# Altium PCB L50T-TEST.PcbDoc (part 1 of 2)
Units mm, origin at the board's own origin, x right, y up, seen from the top; angles counter-clockwise.
Board outline 174.25 x 233.6 mm, 2 copper layers (Top Layer, Bottom Layer); 176 components, 146 nets, 565 pads, 293 vias.
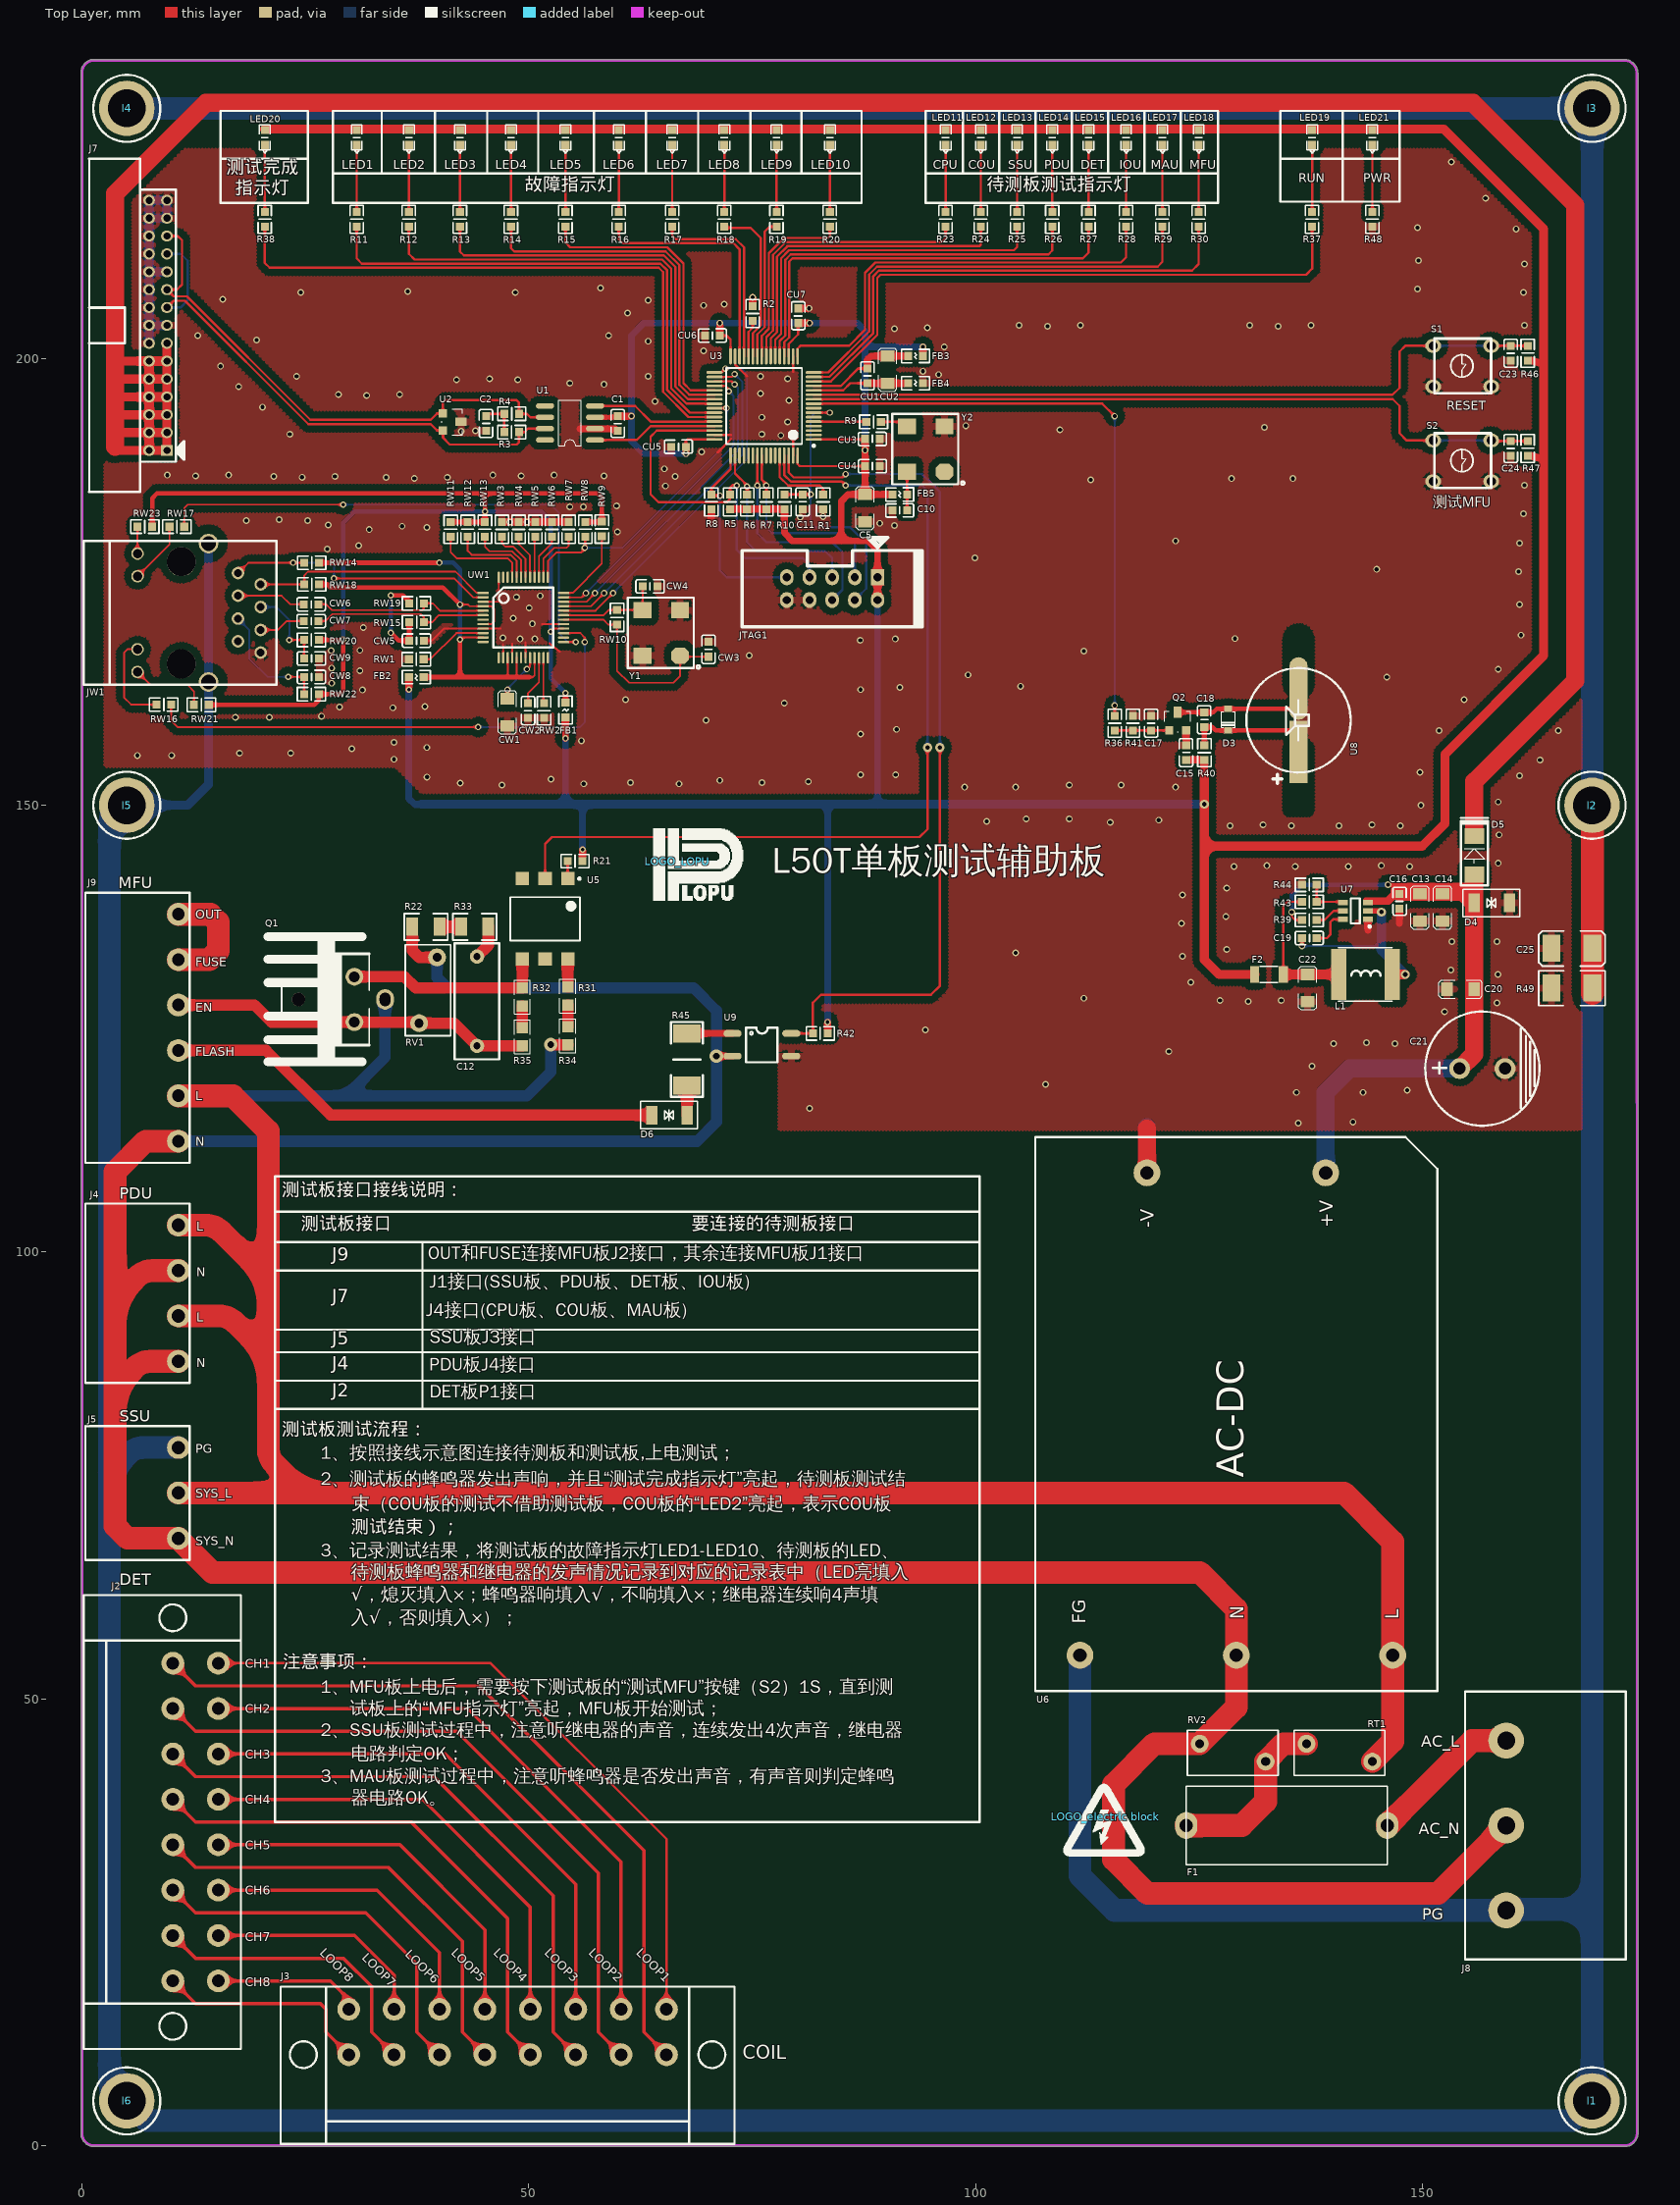
[diagram p0: Top Layer view]
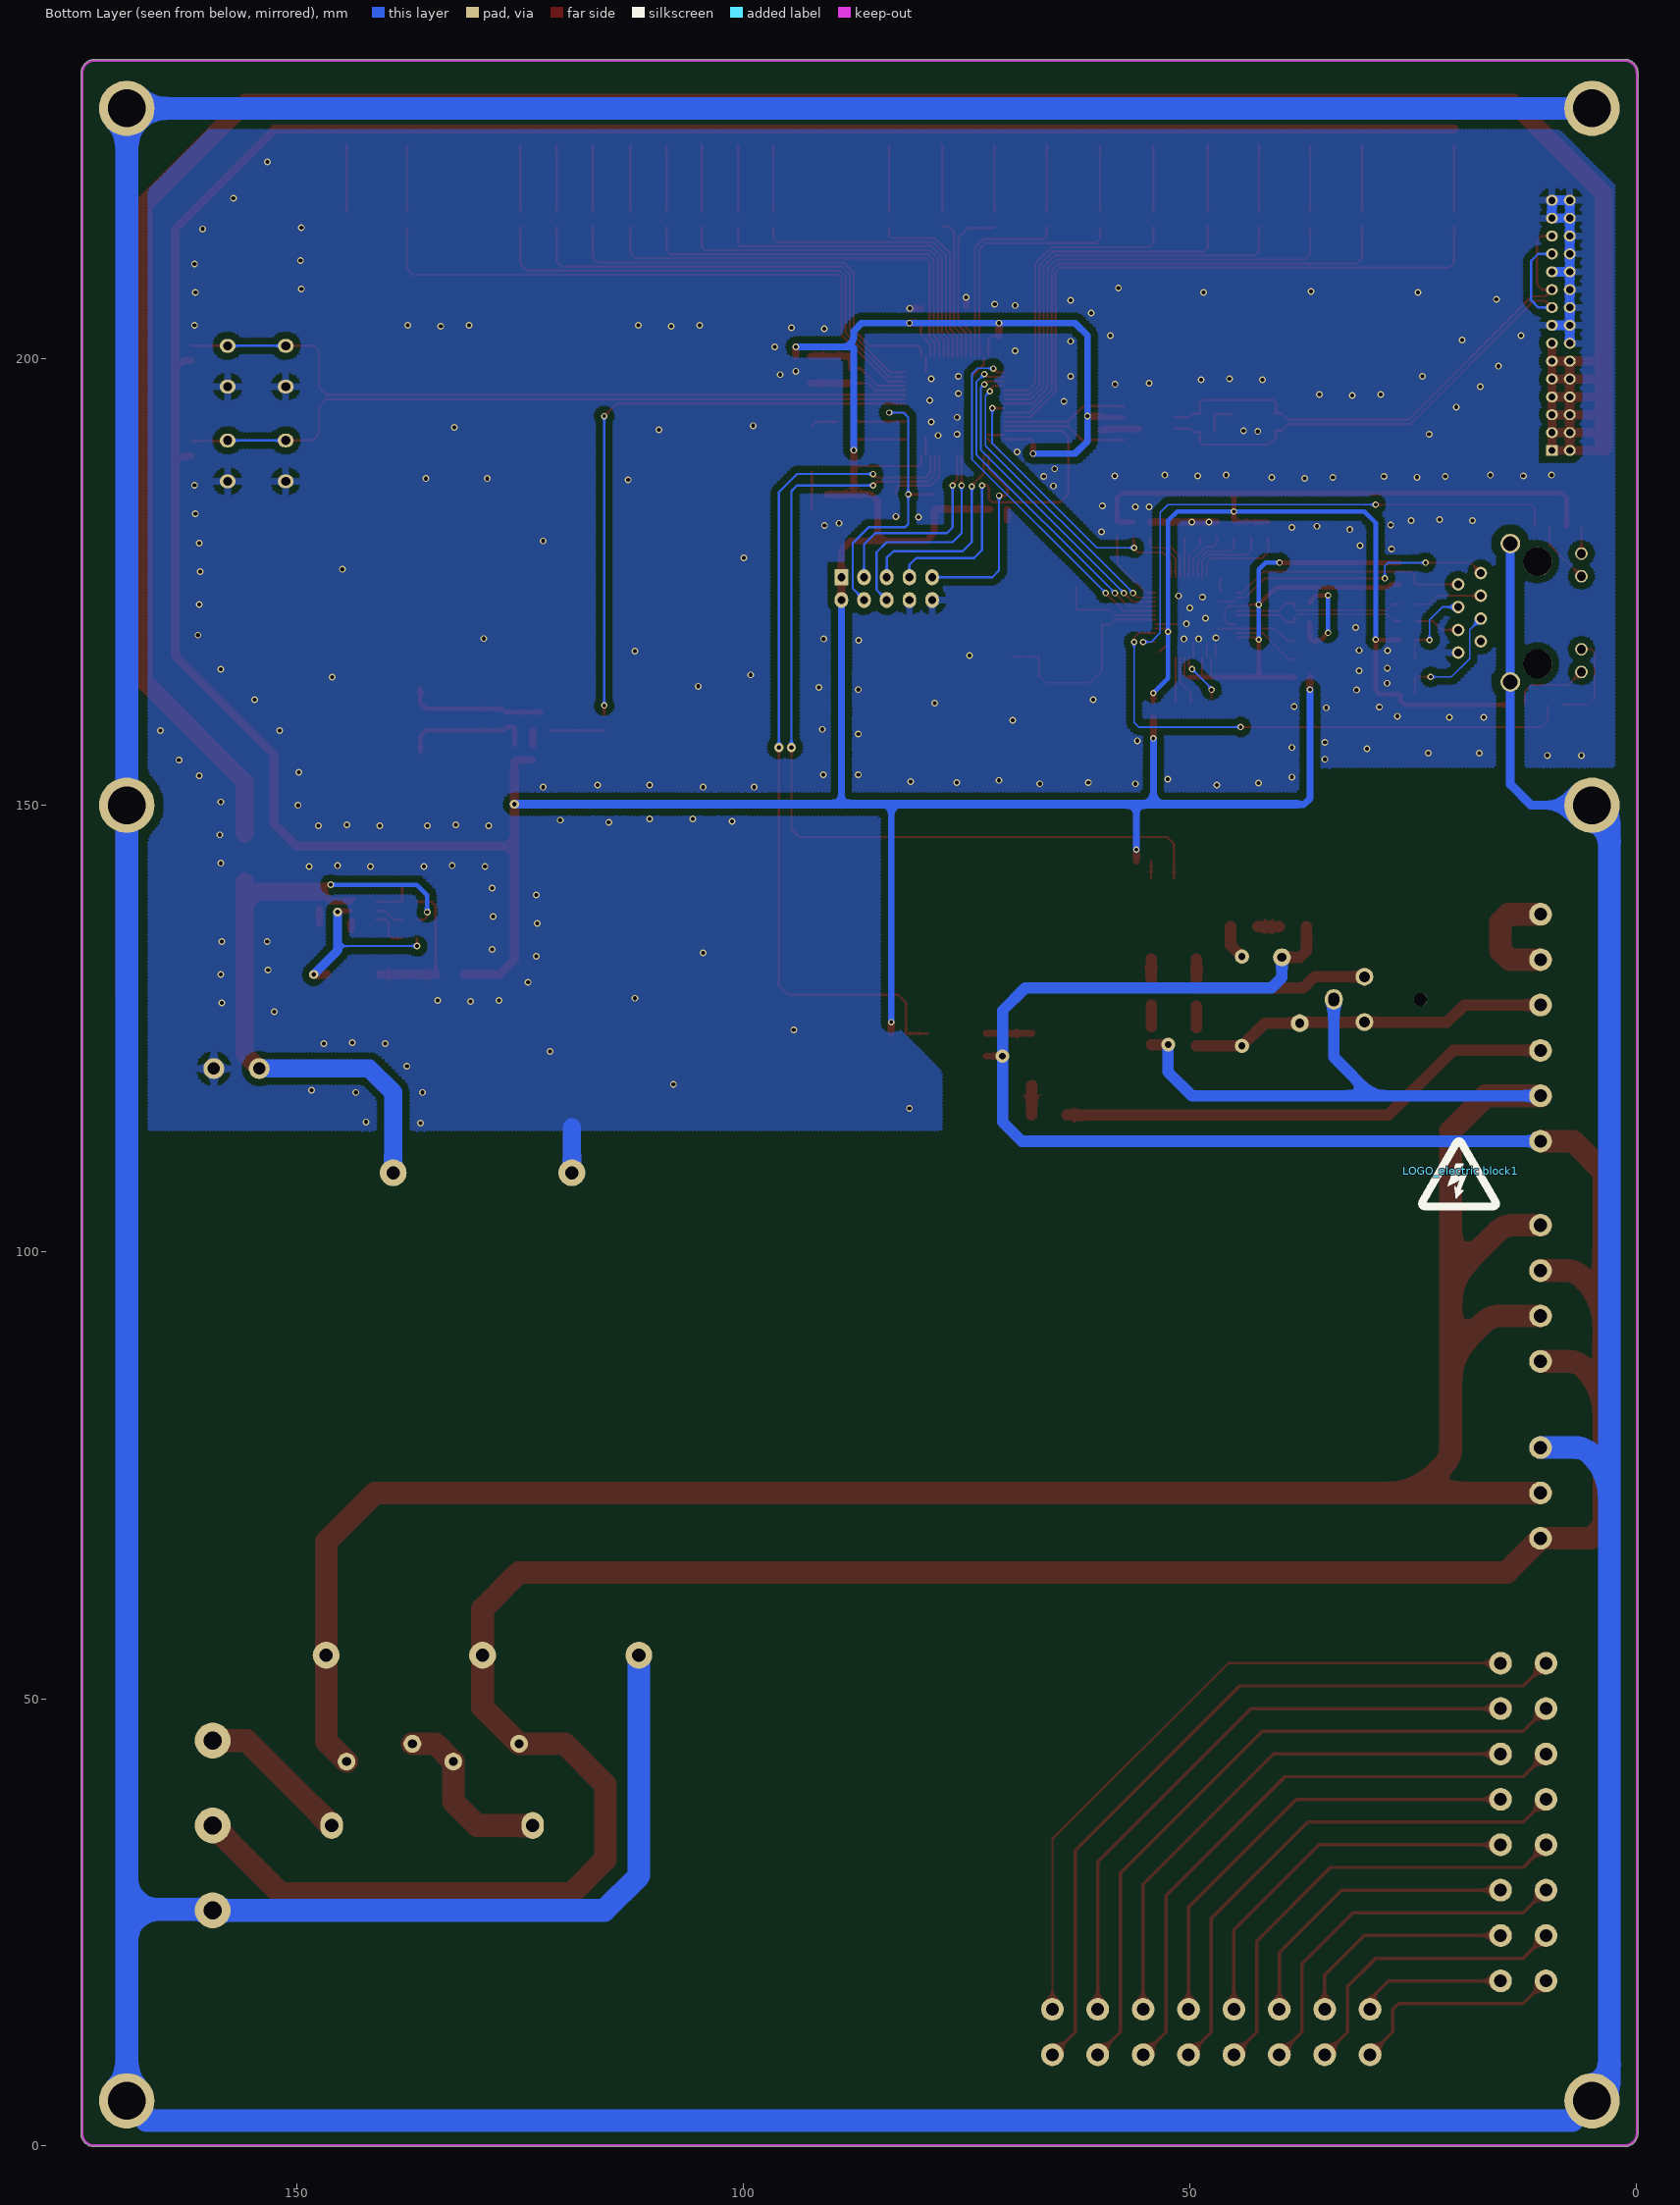
[diagram p1: Bottom Layer view, seen from below]

## Layer stack, top to bottom
Top Solder: solder mask 0.0102, Solder Resist, Dk 3.5
Top Layer: signal copper 0.0356
Dielectric1: dielectric 0.32, FR-4, Dk 4.8
Bottom Layer: signal copper 0.0356
Bottom Solder: solder mask 0.0102, Solder Resist, Dk 3.5

## Board outline
-0.127,1.35 cw(c0,1.35) -0.127,1.351 -0.127,1.35 ccw(c1.35,1.35) 1.35,-0.127 172.65,-0.127 ccw(c172.65,0) 172.682,-0.123 ccw(c172.65,1.354) 174.123,1.236 ccw(c174,1.27) 174.127,1.27 ccw(c174,1.27) 174.127,1.27 174.127,1.351 174.127,1.355 cw(c174,1.354) 174.127,1.354 cw(c172.65,1.354) 174.127,1.351 174.127,1.355 174.117,231.901 ccw(c172.567,231.928) 174.118,231.928 ccw(c172.567,231.928) 172.595,233.477 ccw(c172.593,233.35) 172.593,233.477 1.397,233.477 ccw(c1.397,233.35) 1.375,233.476 ccw(c1.354,233.35) 1.354,233.477 ccw(c1.354,232) -0.115,232.16 ccw(c0,232.105) -0.127,232.105

## Design rules (kind name [scope] priority, off if disabled: settings)
Clearance Clearance_220 [InNetClass('220') vs InNetClass('220')] p1: gap=2.54 ignorepadtopadclearanceinfootprint=FALSE except(0: Arc-Hole Track-Hole SMDPad-Hole THPad-Hole Via-Hole Fill-Hole Poly-Hole Region-Hole Text-Hole)
Clearance Clearance_pg&dgnd [InNet('PG') vs InNet('DGND')] p2: gap=1.016 ignorepadtopadclearanceinfootprint=FALSE except(0: Arc-Hole Track-Hole SMDPad-Hole THPad-Hole Via-Hole Fill-Hole Poly-Hole Region-Hole Text-Hole)
Clearance Clearance_POLY [InPolygon] p3: gap=0.762 ignorepadtopadclearanceinfootprint=FALSE except(0: Arc-Hole Track-Hole SMDPad-Hole THPad-Hole Via-Hole Fill-Hole Poly-Hole Region-Hole Text-Hole)
Clearance Clearance_MCU [InComponent('U3')] p4: gap=0.178 ignorepadtopadclearanceinfootprint=FALSE except(0: Arc-Hole Track-Hole SMDPad-Hole THPad-Hole Via-Hole Fill-Hole Poly-Hole Region-Hole Text-Hole)
Clearance [All] p5: gap=0.203 ignorepadtopadclearanceinfootprint=FALSE except(0: Arc-Hole Track-Hole SMDPad-Hole THPad-Hole Via-Hole Fill-Hole Poly-Hole Region-Hole Text-Hole)
ComponentClearance [All] p1 off: gap=0.254 collisioncheckmode=3 verticalgap=0.254 showdistances=FALSE
DiffPairsRouting [All] p1: maxlimit=0.254 minlimit=0.254 mostfreqgap=0.254 toplayer_minwidth=0.381 toplayer_maxwidth=0.381 toplayer_prefwidth=0.381 bottomlayer_minwidth=0.381 bottomlayer_maxwidth=0.381 bottomlayer_prefwidth=0.381 maxuncoupledlength=12.7
Height [All] p1: minheight=0 maxheight=50.8 prefheight=12.7
HoleSize [All] p1: absolutevalues=TRUE maxlimit=6 minlimit=0.025 maxpercent=80.000 minpercent=20.000
PolygonConnect PolygonConnect_VIA [IsVia] p1: connectstyle=Direct reliefconductorwidth=0.254 reliefentries=4 polygonreliefangle="90 Angle" airgapwidth=0.254
PolygonConnect [All] p2: connectstyle=Relief reliefconductorwidth=0.762 reliefentries=4 polygonreliefangle="90 Angle" airgapwidth=0.508
RoutingVias [All] p1: holewidth=0.457 width=0.762 viastyle="Through Hole" minholewidth=0.254 minwidth=0.254 maxholewidth=1.27 maxwidth=2.54
SilkToSilkClearance [All] p1 off: silktosilkclearance=0.254
SolderMaskExpansion [All] p1: expansion=0.102
Width [All] p1: maxlimit=2.54 minlimit=0.127 preferedwidth=0.254
25 further rules are at their usual default settings.

## Classes and differential pairs
differential pair DifferentialPair_STM32-CAN: +CAN_RX -CAN_TX
differential pair DifferentialPair_CAN: +CAN1_H -CAN1_L
differential pair DifferentialPair_TD: +TD+ -TD-
differential pair DifferentialPair_RD: +RD+ -RD-

## Components (designator, comment, footprint, x,y, rotation, side; value= is the part's Value field where it differs from the comment)
C1 "0603-50V-0.1UF-X7R-K" 0603C 59.944,193.548 r270 top
C2 "DNP" 0603C 45.212,191.897 r90 top
C5 "1206-16V-10UF-X5R-K" 1206C 87.63,181.737 r90 top
C10 "0603-50V-0.1UF-X7R-K" 0603c 92.329,183.007 r180 top
C11 "0603-50V-0.1UF-X7R-K" 0603C 80.645,183.134 r90 top
C12 "B32671L1222J289" CAP-10-5 44.196,133.063 r270 top
C13 "1206-16V-10UF-X5R-K" 1206C 149.733,137.033 r90 top locked
C14 "1206-16V-10UF-X5R-K" 1206C 152.273,137.033 r90 top locked
C15 "0603-50V-0.1UF-X7R-K" 0603C 123.569,155.067 r90 top locked
C16 "0603-50V-0.1UF-X7R-K" 0603C 147.447,140.081 r270 top locked
C17 "0603-50V-0.1UF-X7R-K" 0603C 119.632,160.02 r270 top locked
C18 "0603-50V-0.1UF-X7R-K" 0603C 125.601,158.75 r90 top locked
C19 "0603-50V-0.1UF-X7R-K" 0603C 136.525,135.128 r0 top locked
C20 "1206-16V-10UF-X5R-K" 1206C 155.806,129.413 r180 top
C21 "35YXF220MEFC10X125" RB.2/.4 154.178,120.523 r180 top
C22 "1206-10V-47UF-Y5V-M" 1206C 137.16,128.016 r90 top locked
C23 "0603-50V-0.1UF-X7R-K" 0603C 159.893,201.422 r270 top
C24 "0603-50V-0.1UF-X7R-K" 0603C 159.893,190.754 r270 top
C25 "1812-1NF/2KV" 1812C 169.037,133.985 r180 top locked
CU1 "0603-50V-0.01UF-X7R-K" 0603C 87.884,198.882 r270 top locked
CU2 "1206-16V-10UF-X5R-K" 1206C 90.17,200.279 r270 top locked
CU3 "0603-50V-0.1UF-X7R-K" 0603C 89.281,191.008 r180 top
CU4 "0603-50V-0.1UF-X7R-K" 0603C 89.281,187.96 r180 top
CU5 "0603-50V-0.1UF-X7R-K" 0603C 65.913,190.119 r0 top
CU6 "0603-50V-0.1UF-X7R-K" 0603C 69.723,202.565 r0 top
CU7 "0603-50V-0.1UF-X7R-K" 0603C 80.137,205.613 r270 top
CW1 "1206-16V-4.7UF-X5R-K" 1206C 47.6,161.925 r270 top locked
CW2 "0603-50V-0.01uF-X7R-K" 0603C 49.911,161.417 r270 top locked
CW3 "0603-50V-18pF-C0G-K" 0603C 70.104,168.275 r270 top
CW4 "0603-50V-18pF-C0G-K" 0603C 64.389,174.498 r180 top
CW5 "10n/0603" 0603C 36.601,168.427 r0 top locked
CW6 "0603-50V-6.8nF-X7R-K" 0603C 24.816,172.491 r0 top
CW7 "0603-50V-6.8nF-X7R-K" 0603C 24.816,170.612 r0 top
CW8 "0603-10NF" 0603C 24.841,164.363 r0 top
CW9 "0603-22NF" 0603C 24.841,166.421 r0 top
D3 "1N4148" SOD-323 128.27,158.369 r90 top
D4 "SMBJ15CA" SMB-TVS 159.766,139.065 r180 top locked
D5 "SS14" SMA 155.829,144.399 r90 top locked
D6 "SMBJ130CA" SMB-TVS 67.714,115.316 r180 top locked
F1 "T2AH250VP" FUSE-BF013 146.071,35.814 r180 top
F2 "贴片1206/nSMD035（台湾陆海）" 1206F 132.842,131.064 r180 top
FB1 "0603 31@100MHz" 0603L#1 54.102,160.655 r90 top
FB2 "0603 31@100MHz" 0603L#2 36.576,164.338 r0 top
FB3 "0603 31@100MHz" 0603L#2 94.107,200.279 r180 top locked
FB4 "0603 31@100MHz" 0603L#2 94.107,197.231 r180 top locked
FB5 "0603 31@100MHz" 0603L#2 92.329,184.785 r180 top
I1 "PCB-M3" PADS_M3 169,5 r0 top locked
I2 "PCB-M3" PADS_M3 169,150 r0 top locked
I3 "PCB-M3" PADS_M3 169,228 r0 top locked
I4 "PCB-M3" PADS_M3 5,228 r0 top locked
I5 "PCB-M3" PADS_M3 5,150 r0 top locked
I6 "PCB-M3" PADS_M3 5,5 r0 top locked
J2 "Header 8X2H" KF2EDGKRHM-5.08-8 15.24,18.415 r90 top
J3 "Header 8X2H" KF2EDGKRHM-5.08-8 65.405,15.24 r180 top
J4 "Header 4H" CON-4-5.08 10.77,87.757 r90 top locked
J5 "Header 3" CON-3-5.08 10.77,67.945 r90 top locked
J7 "Header15x2" IDC-30-2.0-C 0.793,186.327 r90 top locked
J8 "Header 3" CON-3-9.5 154.785,50.814 r270 top
J9 "Header 6" CON-6-5.08 10.77,112.395 r90 top locked
JTAG1 "Header 5X2" IDC-10-B 89.027,175.514 r180 top
JW1 "HY911105A" HY911105A 3.087,171.541 r90 top
L1 "贴片6045功率电感 3.3uH 5A" L-6045 143.637,131.064 r270 top locked
LED1 "Red" LED-0603 30.734,225.552 r270 top locked
LED2 "Red" LED-0603 36.576,225.552 r270 top locked
LED3 "Red" LED-0603 42.291,225.552 r270 top locked
LED4 "Red" LED-0603 48.006,225.552 r270 top locked
LED5 "Red" LED-0603 54.102,225.552 r270 top locked
LED6 "Red" LED-0603 60.071,225.552 r270 top locked
LED7 "Red" LED-0603 66.04,225.552 r270 top locked
LED8 "Red" LED-0603 71.882,225.552 r270 top locked
LED9 "Red" LED-0603 77.724,225.552 r270 top locked
LED10 "Red" LED-0603 83.693,225.552 r270 top locked
LED11 "Green" LED-0603 96.647,225.552 r270 top locked
LED12 "Green" LED-0603 100.584,225.552 r270 top locked
LED13 "Green" LED-0603 104.648,225.552 r270 top locked
LED14 "Green" LED-0603 108.585,225.552 r270 top locked
LED15 "Green" LED-0603 112.649,225.552 r270 top locked
LED16 "Green" LED-0603 116.84,225.552 r270 top locked
LED17 "Green" LED-0603 120.904,225.552 r270 top locked
LED18 "Green" LED-0603 124.968,225.552 r270 top locked
LED19 "Blue" LED-0603 137.668,225.552 r270 top locked
LED20 "Yellow" LED-0603 20.447,225.552 r270 top locked
LED21 "Red" LED-0603 144.399,225.552 r270 top locked
"LOGO_electric block" "electric block" "electric block logo" 114.579,36.805 r0 top
"LOGO_electric block1" "electric block" "electric block logo" 19.685,109.093 r180 bottom (schematic designator "LOGO_electric block")
LOGO_LOPU "LOPU_LOGO" LOPU_LOGO 66.599,143.725 r0 top
Q1 "BTA16-600" TO-220AB-C 30.48,125.73 r90 top locked
Q2 "8050" SOT-23 123.569,158.369 r180 top locked
R1 "0603-10K-1%" 0603R 82.931,184.785 r270 top
R2 "0603-10K-1%" 0603R 75.057,205.867 r270 top
R3 "DNP" 0603R 48.895,191.77 r180 top
R4 "DNP" 0603R 47.244,193.802 r0 top
R5 "0603-10K-1%" 0603R 72.517,184.785 r270 top
R6 "0603-10K-1%" 0603R 74.422,184.785 r270 top
R7 "0603-10K-1%" 0603R 76.581,184.785 r270 top
R8 "0603-10K-1%" 0603R 70.427,183.134 r90 top
R9 "0603-22-1%" 0603R 87.757,192.913 r0 top
R10 "0603-10K-1%" 0603R 78.613,184.785 r270 top
R11 "0603-680-1%" 0603R 30.734,214.757 r90 top locked
R12 "0603-680-1%" 0603R 36.576,214.757 r90 top locked
R13 "0603-680-1%" 0603R 42.291,214.757 r90 top locked
R14 "0603-680-1%" 0603R 48.006,214.757 r90 top locked
R15 "0603-680-1%" 0603R 54.102,214.757 r90 top locked
R16 "0603-680-1%" 0603R 60.071,214.757 r90 top locked
R17 "0603-680-1%" 0603R 66.04,214.757 r90 top locked
R18 "0603-680-1%" 0603R 71.882,214.757 r90 top locked
R19 "0603-680-1%" 0603R 77.724,214.757 r90 top locked
R20 "0603-680-1%" 0603R 83.693,214.757 r90 top locked
R21 "0603-330-1%" 0603R 56.007,143.764 r180 top locked
R22 "1210-25.5-1%" 1210R 36.957,136.398 r0 top
R23 "0603-680-1%" 0603R 96.647,214.757 r90 top locked
R24 "0603-680-1%" 0603R 100.584,214.757 r90 top locked
R25 "0603-680-1%" 0603R 104.648,214.757 r90 top locked
R26 "0603-680-1%" 0603R 108.585,214.757 r90 top locked
R27 "0603-680-1%" 0603R 112.649,214.757 r90 top locked
R28 "0603-680-1%" 0603R 116.84,214.757 r90 top locked
R29 "0603-680-1%" 0603R 120.904,214.757 r90 top locked
R30 "0603-680-1%" 0603R 124.968,214.757 r90 top locked
R31 "0805-1.2K-1%" 0805R 54.356,129.667 r270 top locked
R32 "0805-1.2K-1%" 0805R 49.276,129.54 r270 top locked
R33 "1210-25.5-1%" 1210R 42.418,136.398 r0 top
R34 "0805-1.2K-1%" 0805R 54.356,125.222 r270 top locked
R35 "0805-1.2K-1%" 0805R 49.276,125.095 r270 top locked
R36 "0603-4.7K-1%" 0603R 115.568,160.02 r270 top locked
R37 "0603-680-1%" 0603R 137.668,214.757 r90 top locked
R38 "0603-680-1%" 0603R 20.447,214.757 r90 top locked
R39 "0603-10K-1%" 0603R 138.176,137.16 r180 top
R40 "0603-0-1%" 0603R 125.601,156.718 r270 top locked
R41 "0603-3.3K-1%" 0603R 117.6,160.02 r270 top locked
R42 "0603-3.3K-1%" 0603R 83.439,124.46 r180 top
R43 "0603-33.2K-1%" 0603R 136.525,139.192 r0 top locked
R44 "0603-10K-1%" 0603R 138.176,141.097 r180 top locked
R45 "2512-56K-5% RV" 2512R 67.691,121.539 r90 top locked
R46 "0603-10K-1%" 0603R 161.798,199.771 r90 top
R47 "0603-10K-1%" 0603R 161.798,189.103 r90 top
R48 "0603-680-1%" 0603R 144.399,214.757 r90 top locked
R49 "1808-1M-1%" 1812R 163.093,131.445 r270 top locked
RT1 "5D-11" 10D471K 137.033,44.958 r0 top
RV1 "10D471K" 10D471K 39.719,132.969 r270 top
RV2 "10D471K" 10D471K 125.095,44.958 r0 top
RW1 "12.4K/1%/0603" 0603R 38.227,166.345 r180 top locked
RW2 "10K/1%/0603" 0603R 51.689,161.417 r270 top locked
RW3 "10K/1%/0603" 0603R 46.99,181.712 r270 top locked
RW4 "10K/1%/0603" 0603R 48.853,181.712 r270 top locked
RW5 "10K/1%/0603" 0603R 50.715,181.712 r270 top locked
RW6 "10K/1%/0603" 0603R 52.578,181.712 r270 top locked
RW7 "10K/1%/0603" 0603R 54.458,181.712 r270 top locked
RW8 "10K/1%/0603" 0603R 56.312,180.061 r90 top locked
RW9 "10K/1%/0603" 0603R 58.166,180.086 r90 top
RW10 "1M/1%/0603" 0603R 59.868,171.856 r270 top locked
RW11 "10K/1%/0603" 0603R 41.25,180.061 r90 top locked
RW12 "10K/1%/0603" 0603R 43.155,180.061 r90 top locked
RW13 "10K/1%/0603" 0603R 45.085,180.061 r90 top locked
RW14 "49R9/1%/0603" 0603R 24.867,177.14 r0 top
RW15 "82/1%/0603" 0603R 36.601,170.485 r0 top locked
RW16 "330 0603 1%" 0603R 8.306,161.265 r0 top
RW17 "330 0603 1%" 0603R 9.779,181.178 r0 top
RW18 "49R9/1%/0603" 0603R 24.867,174.727 r0 top
RW19 "82/1%/0603" 0603R 36.601,172.593 r0 top locked
RW20 "0603-10-1%" 0603R 26.492,168.504 r180 top
RW21 "0603-680-1%" 0603R 14.173,161.239 r180 top
RW22 "0603-10-1%" 0603R 26.492,162.433 r180 top
RW23 "0603-680-1%" 0603R 7.849,181.178 r180 top
S1 "SW-PB" KEY-6*6*7 151.213,196.85 r0 top
S2 "SW-PB" KEY-6*6*7 151.213,186.254 r0 top
U1 "SN65HVD232" SO-8 51.816,190.881 r0 top
U2 "PESD5V0S2BT" SOT-23 40.386,191.948 r90 top
U3 "STM32F103R8T6" STM-LQFP64_N 76.327,194.691 r180 top locked
U5 "MOC3063S-TA1" MOC3063 51.816,137.287 r270 top locked
U6 "LH15-13B12" AC-DC-15W 151.685,50.864 r90 top
U7 "TPS563200" TSOT23-6 142.494,138.176 r0 top locked
U8 "BUZZER" "BUZZ-.28/.46 -SMT" 136.144,155.956 r90 top
U9 "TLP182(GB" SO-4-2.54 72.796,124.46 r0 top locked
UW1 "W5500" LQFP-48 49.382,171.022 r90 top locked
Y1 "25M贴片无源晶振 7050" XTAL-C 66.929,166.751 r90 top
Y2 "HXO-36A8.00000W" XTAL-C 96.529,187.325 r90 top

## Footprints (in the part's own frame and the unit in brackets; to place one, negate y for a bottom-side part, rotate by r counter-clockwise, add the part's x,y. Pads: shape width x height; smd on the part's side, far side on the other; paste and mask are expansions set on the pad)
10D471K [mm]
  round 2 hole 1: 1(0,0) 2(7.366,-2)
  silkscreen extent -1.4,-3.56 8.76,1.52
0603C [mil]
  rect 35x35 smd: 1(0,0) 2(65,0)
  silkscreen extent -29,-29 94,30
0603c [mil]
  rect 35x35 smd: 1(0,0) 2(65,0)
  silkscreen extent -29,-29 94,30
0603L#1 [mil]
  rect 35x35 smd: 1(-32.5,0) 2(32.5,0)
  silkscreen extent -62,-29 62,30, body extent -31,-15 31,16, height 16
0603L#2 [mil]
  rect 35x35 smd: 1(0,0) 2(65,0)
  silkscreen extent -29,-29 94,30
0603R [mil]
  rect 35x35 smd: 1(0,0) 2(65,0)
  silkscreen extent -29,-29 94,30
0805R [mil]
  rect 50x50 smd: 1(0,0) 2(80,0)
  silkscreen extent -35,-35 115,35
1206C [mil]
  rect 50x60 smd: 1(0,0) 2(120,0)
  silkscreen extent -35,-40 155,40
1206F [mm] "Chip Capacitor, 2-Leads, Body 3.25x1.65mm, IPC Medium Density"
  rect 1x1.85 smd: 1(-1.6,0) 2(1.6,0)
  silkscreen extent -1.02,-0.89 1.02,0.89, body extent -1.6,-0.83 1.6,0.83, height 1.43
1210R [mil]
  rect 52x80 smd: 1(0,0) 2(120,0)
  silkscreen extent -36,-58 156,58
1812C [mm]
  rect 2x3 smd: 1(0,0) 2(4.572,0)
  silkscreen extent -1.42,-1.93 5.99,1.97
1812R [mm]
  rect 3x2 smd: 1(1.905,5.944) 2(1.905,1.372)
  silkscreen extent -0.03,-0.05 3.87,7.37
2512R [mil]
  rect 80x120 smd: 1(-115,0) 2(115,0)
  silkscreen extent -165,-70 165,70, body extent -126,-63 126,63, height 24
AC-DC-15W [mm]
  round 3 hole 1.5: 1(4,40) 2(4,22.5) 3(4,5) 4(58,32.5) 8(58,12.5)
  silkscreen extent 0,0 62,45
"BUZZ-.28/.46 -SMT" [mil]
  rect 275.59x80 smd: 1(0,0)
  oval 275.59x80 smd: 2(280,0)
  silkscreen extent -139,-230 370,230
CAP-10-5 [mm]
  round 1.6 hole 0.8: 1(0,0) 2(10,0)
  silkscreen extent -1.5,-2.5 11.5,2.5
CON-3-5.08 [mil]
  round 100 hole 59: 1(0,0) 2(200,0) 3(400,0)
  silkscreen extent -95,-50 495,410
CON-3-9.5 [mm] "栅栏式接线端子"
  round 4 hole 2: 1(5.5,4.6) 2(15,4.6) 3(24.5,4.6)
  silkscreen extent 0,0 30,18
CON-4-5.08 [mil]
  round 100 hole 59: 1(0,0) 2(200,0) 3(400,0) 4(600,0)
  silkscreen extent -95,-50 695,410
CON-6-5.08 [mil]
  round 100 hole 56: 1(0,0) 2(200,0) 3(400,0) 4(600,0) 5(800,0) 6(1000,0)
  silkscreen extent -95,-50 1095,410
"electric block logo" [mm]
  silkscreen extent -4.75,-4.42 4.34,3.66
FUSE-BF013 [mm]
  oval 2.5x3 hole 1.5: 1(0,0) 2(22.5,0)
  silkscreen extent 0,-4.4 22.5,4.4
HY911105A [mm]
  round 3.25 hole 3.25 unplated: 0(-5.715,-8.013) 0(5.715,-8.013)
  round 1.4 hole 0.89: 1(4.45,-14.363) 2(3.18,-16.903) 3(1.91,-14.363) 4(0.64,-16.903) 5(-0.65,-14.363) 6(-1.92,-16.903) 7(-3.19,-14.363) 8(-4.46,-16.903)
  round 1.4 hole 1.02: 9(6.625,-3.113) 10(4.085,-3.113) 11(-4.085,-3.113) 12(-6.625,-3.113)
  round 2.2 hole 1.63: 13(-7.745,-11.063) 14(7.745,-11.063)
  silkscreen extent -8.05,-18.66 8.05,2.91, body extent -7.94,-18.49 7.94,2.91, height 13.5
IDC-10-B [mil]
  rect 60x70 hole 35: 1(0,0)
  oval 60x70 hole 35: 2(0,100) 3(100,0) 4(100,100) 5(200,0) 6(200,100) 7(300,0) 8(300,100) 9(400,0) 10(400,100)
  silkscreen extent -196,-175 596,218
IDC-30-2.0-C [mm]
  rect 1.219x1.321 hole 0.8: 1(3.38,-8.7)
  oval 1.219x1.321 hole 0.8: 2(3.38,-6.7) 3(5.38,-8.7) 4(5.38,-6.7) 5(7.38,-8.7) 6(7.38,-6.7) 7(9.38,-8.7) 8(9.38,-6.7) 9(11.38,-8.7) 10(11.38,-6.7) 11(13.38,-8.7) 12(13.38,-6.7) 13(15.38,-8.7) 14(15.38,-6.7) 15(17.38,-8.7) 16(17.38,-6.7) 17(19.38,-8.7) 18(19.38,-6.7) 19(21.38,-8.7) 20(21.38,-6.7) 21(23.38,-8.7) 22(23.38,-6.7) 23(25.38,-8.7) 24(25.38,-6.7) 25(27.38,-8.7) 26(27.38,-6.7) 27(29.38,-8.7) 28(29.38,-6.7) 29(31.38,-8.7) 30(31.38,-6.7)
  silkscreen extent -1.27,-10.6 36.03,0.02
KEY-6*6*7 [mil]
  oval 70x60 hole 40: 1(0,0) 1(255.91,0) 2(0,180) 2(255.91,180)
  silkscreen extent 5,-29 255,211
KF2EDGKRHM-5.08-8 [mil]
  round 100 hole 56: 1(0,0) 2(0,200) 3(200,0) 4(200,200) 5(400,0) 6(400,200) 7(600,0) 8(600,200) 9(800,0) 10(800,200) 11(1000,0) 12(1000,200) 13(1200,0) 14(1200,200) 15(1400,0) 16(1400,200)
  silkscreen extent -300,-100 1700,594
L-6045 [mm]
  rect 5.7x1.7 smd: 1(0,3) 2(0,-3)
  Top Layer pour cut-out: -3,-3 -3,3 3,3 3,-3
  silkscreen extent -3,-3 3,3
LED-0603 [mil]
  rect 35x35 smd: 1(0,0) 2(65,0)
  silkscreen extent -23,-24 101,24
LOPU_LOGO [mm]
  silkscreen extent -2.66,-4.33 7.39,3.7
LQFP-48 [mm]
  rect 0.254x1.27 smd: 1(2.75,4.5)
  oval 0.254x1.27 smd: 2(2.25,4.5) 3(1.75,4.5) 4(1.25,4.5) 5(0.75,4.5) 6(0.25,4.5) 7(-0.25,4.5) 8(-0.75,4.5) 9(-1.25,4.5) 10(-1.75,4.5) 11(-2.25,4.5) 12(-2.75,4.5) 25(-2.75,-4.5) 26(-2.25,-4.5) 27(-1.75,-4.5) 28(-1.25,-4.5) 29(-0.75,-4.5) 30(-0.25,-4.5) 31(0.25,-4.5) 32(0.75,-4.5) 33(1.25,-4.5) 34(1.75,-4.5) 35(2.25,-4.5) 36(2.75,-4.5)
  oval 1.27x0.254 smd: 13(-4.5,2.75) 14(-4.5,2.25) 15(-4.5,1.75) 16(-4.5,1.25) 17(-4.5,0.75) 18(-4.5,0.25) 19(-4.5,-0.25) 20(-4.5,-0.75) 21(-4.5,-1.25) 22(-4.5,-1.75) 23(-4.5,-2.25) 24(-4.5,-2.75) 37(4.5,-2.75) 38(4.5,-2.25) 39(4.5,-1.75) 40(4.5,-1.25) 41(4.5,-0.75) 42(4.5,-0.25) 43(4.5,0.25) 44(4.5,0.75) 45(4.5,1.25) 46(4.5,1.75) 47(4.5,2.25) 48(4.5,2.75)
  silkscreen extent -3.36,-3.36 3.36,3.36
MOC3063 [mm] "SOP, 6-Leads, Body 7.30x6.50mm, Pitch 2.54mm, IPC Medium Density"
  rect 1.5x1.5 smd: 1(-4.5,2.54) 2(-4.5,0) 3(-4.5,-2.54) 4(4.5,-2.54) 5(4.5,0) 6(4.5,2.54)
  silkscreen extent -4.62,-3.9 2.42,3.97, body extent -3.5,-3.9 3.5,3.9, height 2.65
PADS_M3 [mm]
  round 6.2 hole 4.22: 1(0,0)
  silkscreen extent -3.75,-3.75 3.75,3.75
RB.2/.4 [mil]
  round 92 hole 54: 1(0,0) 2(-200,0)
  silkscreen extent -352,-252 152,251, body extent -297,-197 97,197, height 791
SMA [mil]
  rect 70x85 smd: 1(-85,0) 2(85,0)
  silkscreen extent -132,-60 165,60
SMB-TVS [mm] "SMBJ*CA"
  rect 1.27x2.1 smd: 1(0,0) 2(3.96,0)
  silkscreen extent -1.14,-1.52 5.21,1.52
SO-4-2.54 [mil]
  oval 80x30 smd: 1(0,0) 2(0,-100) 3(259,-100) 4(259,0)
  silkscreen extent 60,-127 198,25
SO-8 [mil]
  oval 80x24 smd: 1(220,0) 2(220,50) 3(220,100) 4(220,150) 5(0,150) 6(0,100) 7(0,50) 8(0,0)
  silkscreen extent 60,-25 160,175
SOD-323 [mil]
  rect 28x36 smd: 1(95,0) 2(0,0)
  silkscreen extent 12,-30 82,30
SOT-23 [mil]
  rect 36x36 smd: 1(75,0) 2(0,0)
  rect 36x50 smd: 3(38,-80)
  silkscreen extent -20,-85 95,5
STM-LQFP64_N [mm] "Thin QFP, 64-Leads, Body 10x10mm, Pitch 0.5mm, IPC Medium Density"
  oval 1.8x0.3 smd: 1(-5.55,3.75) 2(-5.55,3.25) 3(-5.55,2.75) 4(-5.55,2.25) 5(-5.55,1.75) 6(-5.55,1.25) 7(-5.55,0.75) 8(-5.55,0.25) 9(-5.55,-0.25) 10(-5.55,-0.75) 11(-5.55,-1.25) 12(-5.55,-1.75) 13(-5.55,-2.25) 14(-5.55,-2.75) 15(-5.55,-3.25) 16(-5.55,-3.75) 33(5.55,-3.75) 34(5.55,-3.25) 35(5.55,-2.75) 36(5.55,-2.25) 37(5.55,-1.75) 38(5.55,-1.25) 39(5.55,-0.75) 40(5.55,-0.25) 41(5.55,0.25) 42(5.55,0.75) 43(5.55,1.25) 44(5.55,1.75) 45(5.55,2.25) 46(5.55,2.75) 47(5.55,3.25) 48(5.55,3.75)
  oval 0.3x1.8 smd: 17(-3.75,-5.55) 18(-3.25,-5.55) 19(-2.75,-5.55) 20(-2.25,-5.55) 21(-1.75,-5.55) 22(-1.25,-5.55) 23(-0.75,-5.55) 24(-0.25,-5.55) 25(0.25,-5.55) 26(0.75,-5.55) 27(1.25,-5.55) 28(1.75,-5.55) 29(2.25,-5.55) 30(2.75,-5.55) 31(3.25,-5.55) 32(3.75,-5.55) 49(3.75,5.55) 50(3.25,5.55) 51(2.75,5.55) 52(2.25,5.55) 53(1.75,5.55) 54(1.25,5.55) 55(0.75,5.55) 56(0.25,5.55) 57(-0.25,5.55) 58(-0.75,5.55) 59(-1.25,5.55) 60(-1.75,5.55) 61(-2.25,5.55) 62(-2.75,5.55) 63(-3.25,5.55) 64(-3.75,5.55)
  silkscreen extent -5.68,-4.25 4.25,4.57, body extent -5,-5 5,5, height 1.6
TO-220AB-C [mm]
  round 1.5 hole 1.5: 0(2.54,6.258)
  round 2 hole 1.2: 1(0,0) 3(5.08,0)
  oval 2.3x2 hole 1.2 slot 1.5 at 0 deg: 2(2.54,-3.429)
  silkscreen extent -4.46,-1.65 9.54,9.66
TSOT23-6 [mm]
  rect 1.1x0.6 smd: 1(1.4,-0.95) 2(1.4,0) 3(1.4,0.95) 4(-1.4,0.95) 5(-1.4,0) 6(-1.4,-0.95)
  silkscreen extent -0.5,-1.87 1.73,1.4
XTAL-C [mm]
  oct 1.8x2 smd: 1(0,0)
  rect 1.8x2 smd: 2(5.08,0) 3(5.08,4.2) 4(0,4.2)
  silkscreen extent -1.45,-2.21 6.48,5.84

## Part data
C1 C2 C5 C11 C13 C14 C15 C16 C17 C18 C19 C20 C22 CU1 CU2 CU3 CU4 CU5 CU6 CU7 CW8 CW9: library part Cap, "Capacitor"
C10 C12 C23 C24 C25 CW2 CW3 CW4 CW5 CW6 CW7: library part CAP, "Capacitor"
C21: library part "Cap Pol1", "Polarized Capacitor (Radial)"
CW1: library part Cap, "贴片电容"
D3: library part "Diode 1N4148", "High Conductance Fast Diode"
D4 D6: library part TVSC
D5: library part DIODE, "Diode"
F1 F2: library part "Fuse 1", "Fuse"
FB1 FB2 FB3 FB4 FB5 L1: library part Inductor, "Inductor"
I1 I2 I3 I4 I5 I6: library part PCB-M
J2 J3: "Header, 8-Pin, Dual row, Right Angle"
J4: "Header, 4-Pin, Right Angle"
J5 J8: "Header, 3-Pin"
J9: "Header, 6-Pin"
JTAG1: "Header, 5-Pin, Dual row"
LED1 LED2 LED3 LED4 LED5 LED6 LED7 LED8 LED9 LED10 LED11 LED12 LED13 LED14 LED15 LED16 LED17 LED18 LED19 LED20 LED21: library part LED
"LOGO_electric block" "LOGO_electric block1" LOGO_LOPU: library part "TEST PAD"
Q1: library part TRIAC, "使用黑色散热片,宽15*齿高10*长22mm,孔18mm"
Q2: library part NPN, "NPN Transistor"
R1 R2 R3 R4 R5 R6 R7 R8 R9 R10 R11 R12 R13 R14 R15 R16 R17 R18 R19 R20 R23 R24 R25 R26 R27 R28 R29 R30 R36 R37 R38 R39 R40 R41 R43 R44 R46 R47 R48 R49 RW16 RW17 RW20 RW21 RW22 RW23: library part Res1, "Resistor"
R21 R22 R31 R32 R33 R34 R35 R42 R45: library part "Res Semi", "Semiconductor Resistor"
RT1 RV1 RV2: library part "Fuse Thermal", "Thermal Fuse"
RW1 RW2 RW3 RW4 RW5 RW6 RW7 RW8 RW9 RW11 RW12 RW13 RW14 RW15 RW18 RW19: library part RES1
RW10: library part Res2, "Resistor"
S1 S2: "Switch"
U2: library part NUP2105L, "TVS protect"
U3: "LQFP64"
U5: library part MOC3063S
U6: library part AC-DC-12-10W
U7: library part TPS562200
U8: "TMB12A03"
U9: library part TLP126
Y1: library part OSC5032, "Crystal Oscillator"
Y2: library part osc

## Via types
v1: diameter 0.762, hole 0.457, Top Layer to Bottom Layer, tented both sides, 242 vias
v2: diameter 0.711, hole 0.406, Top Layer to Bottom Layer, tented both sides, 44 vias
v3: diameter 1.016, hole 0.508, Top Layer to Bottom Layer, tented both sides, 5 vias
v4: diameter 1.524, hole 0.762, Top Layer to Bottom Layer, tented both sides, 2 vias

## Nets (pads, with @x,y where several pads share a name; then routed paths per layer and width w, separated by ;. In a path a pad name is that pad's centre, name@x,y a point inside that pad or via, vN(x,y) a via of type N, cw(c..) or ccw(c..) an arc to the next point about the centre after c; other vN are vias at no path point)
3V3A: FB2.2 RW14.2 RW18.2 UW1.4 UW1.8 UW1.11 UW1.15 UW1.17 UW1.21 | length 78.7
  Top Layer w0.203: v2(42.291,168.529) 42.534,168.772 UW1.11@44.882,168.772 ; v2(42.291,172.466) 43.18,172.466 43.374,172.272 UW1.4@44.882,172.272 45.787,172.272 46.101,171.958 46.101,170.561 45.812,170.272 UW1.8@44.882,170.272 ; 47.117,164.338 ccw(c47.057,164.913) 47.631,164.846 ; 47.632,164.345 47.632,164.839 ; UW1.15@47.632,166.522 47.632,164.846 ; 48.514,164.338 48.632,164.456 48.632,164.837 ; UW1.17@48.632,166.522 48.632,164.846 ; 49.149,164.338 cw(c49.144,164.851) 49.14,164.338 cw(c49.144,164.851) 48.632,164.837 ; 50.038,164.338 50.419,164.338 50.632,164.551 UW1.21@50.632,166.522 ; 47.632,164.839 ccw(c48.136,164.843) 48.133,164.338 ccw(c48.128,164.841) 48.632,164.837 ; 47.632,164.839 cw(c48.136,164.843) 47.632,164.846 ; 47.632,164.839 47.632,164.846 ; 48.632,164.837 ccw(c48.128,164.841) 48.632,164.846 ; 48.632,164.837 cw(c49.144,164.851) 48.632,164.846 ; 48.632,164.837 48.632,164.846
  Top Layer w0.508: RW18.2@26.518,174.727 27.457,174.727 27.813,174.371 40.386,174.371 v2(42.291,172.466) ; RW14.2@26.518,177.14 v2(39.98,177.14) ; FB2.2@38.227,164.338 41.529,164.338 ; v2(42.291,168.529) 42.291,165.1 ; 50.038,164.338 49.149,164.338 49.14,164.338 48.514,164.338 48.133,164.338 47.117,164.338 43.053,164.338 ; 41.529,164.338 ccw(c41.529,165.1) 42.291,165.1 ; 41.529,164.338 42.291,164.338 ; 42.291,164.338 42.291,165.1 ; 42.291,164.338 43.053,164.338 ; 42.291,165.1 ccw(c43.053,165.1) 43.053,164.338
  Bottom Layer w0.508: v2@40.005,177.165 41.529,177.165 42.291,176.403 v2(42.291,172.466) v2(42.291,168.529)
3V3D: FB1.2 RW8.2 RW9.2 RW11.2 RW12.2 RW13.2 RW20.1 RW21.1 RW22.1 RW23.1 UW1.28 | length 152.7
  Top Layer w0.203: v2(52.451,169.418) 52.805,169.772 UW1.28@53.882,169.772
  Top Layer w0.508: RW23.1@8.001,181.331 RW23.1@7.849,181.178 7.849,184.379 8.382,184.912 41.781,184.912 ; RW21.1@14.173,161.239 25.984,161.239 26.492,161.747 RW22.1@26.492,162.433 28.829,162.433 29.21,162.814 29.21,168.504 RW20.1@26.492,168.504 ; RW11.2@41.25,181.712 RW12.2@43.155,181.712 RW13.2@45.085,181.712 v2(45.085,182.88) 45.085,184.912 ; 41.783,184.912 ccw(c41.783,184.404) 41.781,184.912 ; 43.688,184.912 ccw(c43.675,184.391) 43.662,184.912 ; FB1.2@54.102,161.481 v2(54.102,162.56) ; RW8.2@56.314,181.714 RW8.2@56.312,181.712 58.141,181.712 RW9.2@58.166,181.737 58.166,184.404 57.658,184.912 45.847,184.912 ; 41.781,184.912 43.662,184.912 ; 43.662,184.912 44.196,184.912 ; 44.196,184.912 cw(c44.259,184.087) 44.323,184.912 ; 44.196,184.912 44.323,184.912 ; 44.323,184.912 cw(c44.259,184.087) 45.085,184.15 cw(c45.847,184.15) 45.847,184.912 ; 44.323,184.912 45.085,184.912 ; 45.085,184.912 45.847,184.912
  Bottom Layer w0.508: v2(29.21,168.529) 29.21,181.61 30.48,182.88 v2(45.085,182.88) 51.435,182.88 52.451,181.864 v2(52.451,169.418) 52.451,164.211 v2(54.102,162.56)
220_L: F1.1 J8.1 | length 17.2
  Top Layer w2.54: F1.1@146.071,35.814 155.571,45.314 J8.1@159.385,45.314
220_N: J4.1 J4.3 J5.1 J8.2 J9.1 R22.1 RV1.1 RV2.1 U6.2 U9.2 | length 395.5
  Top Layer w0.762: v4(70.993,121.92) U9.2@72.796,121.92
  Top Layer w1.27: R22.1@36.957,136.398 36.957,133.731 37.719,132.969 RV1.1@39.719,132.969
  Top Layer w2.54: J4.1@10.77,87.757 7.656,87.757 ccw(c7.656,85.217) 5.86,87.013 3.683,84.836 ; J4.3@10.77,97.917 7.91,97.917 ccw(c7.91,95.377) 6.114,97.173 3.683,94.742 ; J9.1@10.77,112.395 7.112,112.395 3.683,108.966 3.683,94.742 ; J8.2@159.385,35.814 151.765,28.194 119.253,28.194 115.443,32.004 115.443,40.386 120.015,44.958 RV2.1@125.095,44.958 129.185,49.048 U6.2@129.185,54.864 129.185,60.045 125.095,64.135 14.58,64.135 J5.1@10.77,67.945 5.08,67.945 3.683,69.342 3.683,84.836 ; 3.683,84.836 3.683,94.742
  Bottom Layer w1.27: J9.1@10.77,112.395 68.834,112.395 70.993,114.554 v4(70.993,121.92) 70.993,127 68.453,129.54 40.894,129.54 39.719,130.715 RV1.1@39.719,132.969
AGND: CU1.2 CU2.2 FB4.2 U3.12 | length 10.9
  Top Layer w0.254: U3.12@81.877,196.441 85.189,196.441 85.979,197.231 CU1.2@87.884,197.231
  Top Layer w0.762: CU1.2@87.884,197.231 CU2.2@90.17,197.231 FB4.2@92.456,197.231
Beep: R36.1 U3.9 | length 67.8
  Top Layer w0.254: U3.9@81.877,194.941 114.177,194.941 v2(115.568,193.55) ; R36.1@115.568,160.02 v2(115.568,161.163)
  Bottom Layer w0.254: v2(115.568,161.163) v2(115.568,193.55)
CAN1_H: J7.17 J7.23 R3.1 U1.7 U2.2 | length 61
  Top Layer w0.254: J7.17@9.493,205.707 10.239,206.453 11.523,206.453 25.329,192.646 39.027,192.646 39.726,191.948 U2.2@40.386,191.948 40.386,191.135 41.148,190.373 48.641,190.373 48.895,190.627 R3.1@48.895,191.77 49.53,191.77 49.911,192.151 U1.7@51.816,192.151
  Top Layer w0.381: U2.2@40.302,191.864 U2.2@40.386,191.948
  Bottom Layer w0.254: J7.17@9.493,205.707 11.016,205.707 11.811,206.502 11.811,210.947 11.051,211.707 J7.23@9.493,211.707
CAN1_L: J7.19 J7.25 R4.2 U1.6 U2.1 | length 60.3
  Top Layer w0.254: J7.25@9.493,213.707 10.702,213.707 11.176,213.233 11.176,208.28 10.603,207.707 J7.19@9.493,207.707 10.239,206.961 11.733,206.961 25.54,193.154 39.027,193.154 39.726,193.853 U2.1@40.386,193.853 ; U2.1@40.375,193.864 40.375,195.061 40.64,195.326 48.641,195.326 48.895,195.072 R4.2@48.895,193.802 49.784,193.802 50.165,193.421 U1.6@51.816,193.421
  Top Layer w0.381: U2.1@40.375,193.864 U2.1@40.386,193.853
CAN_RX: U1.4 U3.44 | length 14.1
  Top Layer w0.254: U1.4@57.404,194.691 61.885,194.691 63.627,192.949 ; 63.627,192.941 U3.44@70.777,192.941
CAN_TX: U1.1 U3.45 | length 14
  Top Layer w0.254: U1.1@57.404,190.881 62.067,190.881 63.627,192.441 U3.45@70.777,192.441
DGND: C1.2 C2.1 C5.1 C10.2 C11.1 C13.1 C14.1 C15.2 C16.2 C17.1 C20.2 C21.2 C22.1 C23.2 C24.2 C25.2 CU3.1 CU4.1 CU5.1 CU6.1 CU7.1 CW1.2 CW2.2 CW3.1 CW4.1 CW5.2 CW8.2 CW9.2 D4.1 FB4.1 J7.14 J7.15 J7.16 J7.18 J7.20 J7.21 J7.22 J7.24 J7.26 J7.27 J7.28 J7.29 J7.30 JTAG1.8 JTAG1.10 JW1.8 Q2.2 R1.2 R2.1 R8.1 R41.1 R44.2 R48.1 R49.2 RW1.2 RW2.2 RW3.1 RW4.1 RW5.1 RW6.1 RW7.1 S1.1 S2.1 U1.2 U2.3 U3.18 U3.31 U3.47 U3.63 U6.4 U7.1 U9.3 UW1.3 UW1.9 UW1.14 UW1.16 UW1.19 UW1.29 UW1.48 Y1.2 Y1.4 Y2.2 | length 87.4
  Top Layer w0.203: CW5.2@38.252,168.427 39.141,168.427 40.486,169.772 UW1.9@44.882,169.772 46.83,169.772 ; UW1.3@44.882,172.772 46.778,172.772 ; 46.632,173.936 UW1.48@46.632,175.522 ; UW1.14@47.132,166.522 47.132,168.021 ; UW1.16@48.132,166.522 UW1.16@48.132,166.522 48.133,168.109 ; UW1.19@49.632,166.522 49.632,168.275 ; 51.48,170.272 UW1.29@53.882,170.272
  Top Layer w0.254: 52.305,168.118 53.442,167.193 ; U3.47@70.777,191.441 72.629,191.441 ; 71.136,189.5 72.628,190.992 ; U3.31@73.077,200.241 73.077,199.338 74.409,198.006 ; U3.63@79.577,189.141 79.577,191.135 ; 79.577,198.522 U3.18@79.577,200.241
  Top Layer w0.762: RW3.1@46.99,181.712 v1@47.854,181.712 ; v1(47.879,181.686) v1@47.854,181.712 ; v1(49.784,181.686) v1@49.759,181.712 ; RW7.1@54.458,181.712 RW6.1@52.578,181.712 RW5.1@50.715,181.712 v1@49.759,181.712 ; 55.728,192.151 U1.2@57.404,192.151 59.69,192.151 C1.2@59.944,191.897 ; 70.427,181.922 R8.1@70.427,183.134 ; R2.1@75.057,205.867 v1(75.057,206.832) ; CU7.1@80.137,205.613 v1(81.356,205.613) ; C15.2@123.569,156.718 Q2.2@123.569,158.369 ; 143.894,136.02 U7.1@143.894,137.033 ; 147.447,136.779 C16.2@147.447,138.43 ; v1@47.854,181.712 RW4.1@48.853,181.712 v1@49.759,181.712
  Top Layer w2.032: U6.4@119.185,108.864 119.185,113.792
  Bottom Layer w1.016: J7.14@7.493,201.707 J7.16@7.493,203.707 ; J7.15@9.493,203.707 J7.16@7.493,203.707 ; J7.21@9.493,209.707 J7.22@7.493,209.707 ; J7.16@7.493,203.707 J7.18@7.493,205.707 J7.20@7.493,207.707 J7.22@7.493,209.707 ; J7.22@7.493,209.707 J7.24@7.493,211.707 J7.26@7.493,213.707 J7.28@7.493,215.707 ; J7.28@7.493,215.707 J7.30@7.493,217.707 J7.29@9.493,217.707 J7.27@9.493,215.707 J7.28@7.493,215.707
  Bottom Layer w2.032: U6.4@119.185,108.864 119.185,113.978
  other v1: 136.119,114.427 142.24,114.554 81.407,116.078 135.915,117.856 143.358,117.856 148.311,118.11 107.823,118.745 137.643,120.777 121.641,122.428 140.081,123.317 146.939,123.317 143.764,123.419 94.361,124.841 152.502,126.873 158.369,127.889 130.531,128.041 127.356,128.143 134.214,128.143 112.116,128.397 124.079,130.175 158.471,131.064 153.187,131.572 123.165,133.096 104.496,133.477 128.118,133.858 153.289,134.747 158.369,134.747 123.063,136.779 128.016,137.541 123.165,139.954 128.118,140.716 128.905,143.129 135.763,143.129 141.732,143.129 148.59,143.129 132.588,143.231 145.415,143.231 158.496,143.51 158.598,146.685 128.499,147.701 135.357,147.701 140.691,147.701 147.549,147.701 132.182,147.803 144.374,147.803 115.062,148.082 101.244,148.184 120.498,148.336 105.664,148.463 110.49,148.463 149.835,149.987 158.496,150.368 98.781,152.019 104.496,152.019 122.403,152.019 46.99,152.273 110.49,152.273 116.307,152.273 56.134,152.4 66.802,152.4 42.316,152.476 61.366,152.527 76.098,152.527 81.28,152.654 71.374,152.781 52.476,152.908 38.608,153.162 160.884,153.289 87.122,153.416 91.059,153.416 149.733,153.67 163.17,155.067 34.9,155.143 6.198,155.575 10.008,155.575 17.628,155.829 23.343,155.829 30.201,156.337 38.583,156.464 34.9,157.048 55.88,157.226 87.122,157.988 151.892,158.369 165.227,158.369 91.161,158.496 69.85,159.512 17.145,159.842 20.955,159.842 26.797,159.969 34.773,160.909 28.804,160.985 38.354,161.036 78.588,161.417 60.833,161.798 154.686,161.798 31.369,162.89 87.122,162.941 91.542,163.195 105.029,163.322 27.94,163.652 146.025,164.338 99.162,164.592 31.09,165.049 158.496,165.227 27.915,165.354 74.676,166.751 112.116,167.259 27.889,167.297 31.09,167.335 87.097,168.478 49.022,168.605 50.673,168.605 91.008,168.605 129.032,168.656 47.092,168.732 161.036,169.037 31.471,169.875 50.394,170.307 48.26,170.942 50.038,172.085 160.884,172.466 48.616,173.304 51.283,173.431 160.782,176.149 144.882,176.403 99.924,177.673 27.432,178.689 30.963,179.07 160.884,179.324 122.403,179.578 59.919,180.594 32.131,180.848 38.583,181.102 35.814,181.229 90.907,181.305 27.534,181.356 89.281,181.559 18.39,181.864 25.248,181.864 22.073,181.966 80.391,182.245 82.931,182.321 161.315,182.626 54.585,183.388 56.109,183.388 59.817,183.515 65.293,185.732 161.417,185.801 112.878,186.436 128.651,186.563 135.509,186.563 37.186,186.588 34.011,186.69 40.869,186.69 24.613,186.715 66.363,186.802 21.438,186.817 28.296,186.817 12.7,186.842 49.149,186.842 58.42,186.842 9.525,186.944 16.383,186.944 45.974,186.944 52.832,186.944 65.151,187.655 69.342,189.56 78.207,191.389 23.241,191.516 76.073,191.516 42.418,191.833 44.005,191.897 109.449,192.024 132.334,192.278 98.908,192.481 78.969,192.913 76.073,193.421 20.193,194.564 64.11,195.199 79.121,195.326 31.852,195.859 28.677,195.961 35.535,195.961 75.921,196.088 17.526,196.85 58.395,197.104 54.585,197.231 41.91,197.612 48.768,197.612 45.593,197.714 78.969,197.739 24.003,197.993 63.348,197.993 75.921,197.993 95.86,198.196 94.107,198.577 15.494,199.136 69.571,200.863 96.495,201.295 63.348,201.93 19.533,202.057 12.954,202.565 58.928,202.565 90.932,203.327 94.615,203.429 108.052,203.606 133.858,203.606 104.877,203.708 111.735,203.708 130.683,203.708 137.541,203.708 161.417,203.708 61.062,205.105 69.571,205.943 71.857,206.07 63.348,206.502 15.723,206.629 24.486,207.391 48.489,207.391 161.315,207.391 36.449,207.518 149.454,207.772 58.014,207.899 161.417,210.566 149.555,210.947 160.503,214.503 149.454,214.63 157.074,217.932 153.264,221.996
JTCK: JTAG1.9 R8.2 U3.49 | length 22.4
  Top Layer w0.254: v2(71.374,184.658) 70.554,184.658 R8.2@70.427,184.785 70.427,185.489 72.577,187.639 U3.49@72.577,189.141
  Bottom Layer w0.254: v2(71.374,184.658) 71.374,176.276 72.136,175.514 JTAG1.9@78.867,175.514
JTDI: JTAG1.5 R6.1 U3.50 | length 23.7
  Top Layer w0.254: U3.50@73.077,189.141 73.077,187.146 74.422,185.801 v2(74.422,185.674) R6.1@74.422,184.785
  Bottom Layer w0.254: v2@74.422,185.801 v2(74.422,185.674) 74.422,179.451 75.438,178.435 83.185,178.435 83.947,177.673 JTAG1.5@83.947,175.514
JTDO: JTAG1.6 U3.55 | length 24.9
  Top Layer w0.254: v2(75.565,185.801) 75.577,185.813 U3.55@75.577,189.141
  Bottom Layer w0.254: v2(75.565,185.801) 75.565,180.467 76.581,179.451 83.947,179.451 85.09,178.308 85.09,174.117 JTAG1.6@83.947,172.974
JTMS: JTAG1.7 R5.1 U3.46 | length 42.9
  Top Layer w0.254: U3.46@70.777,191.941 64.306,191.941 63.627,191.262 63.627,184.798 64.516,183.909 72.149,183.909 72.517,184.277 R5.1@72.517,184.785 72.517,185.547 72.771,185.801 v2(73.279,185.801)
  Bottom Layer w0.254: v2(73.279,185.801) 73.279,178.562 74.168,177.673 80.645,177.673 81.407,176.911 JTAG1.7@81.407,175.514
JTRST: JTAG1.3 R7.1 U3.56 | length 23.6
  Top Layer w0.254: U3.56@76.077,189.141 76.077,186.432 76.581,185.928 v2(76.581,185.801) R7.1@76.581,184.785
  Bottom Layer w0.254: v2(76.581,185.801) 76.581,181.102 77.216,180.467 85.217,180.467 86.487,179.197 JTAG1.3@86.487,175.514
KEY1: C23.1 R46.2 S1.2 U3.11 | length 84.6
  Top Layer w0.254: U3.11@81.877,195.941 146.665,195.941 147.447,196.723 147.447,200.787 148.082,201.422 S1.2@151.213,201.422 ; S1.2@157.713,201.422 C23.1@159.893,201.422 R46.2@161.798,201.422
  Bottom Layer w0.254: S1.2@151.213,201.422 S1.2@157.713,201.422
KEY2: C24.1 R47.2 S2.2 U3.10 | length 83.6
  Top Layer w0.254: U3.10@81.877,195.441 146.697,195.441 147.447,194.691 147.447,191.643 148.264,190.826 S2.2@151.213,190.826 ; S2.2@157.713,190.826 157.785,190.754 C24.1@159.893,190.754 R47.2@161.798,190.754
  Bottom Layer w0.254: S2.2@151.213,190.826 S2.2@157.713,190.826
L1A: J2.2 J3.16 | length 24.6
  Top Layer w0.381: J2.2@10.16,18.415 12.7,15.875 26.67,15.875 27.305,15.24 27.305,12.7 J3.16@29.845,10.16
L1B: J2.1 J3.15 | length 16.6
  Top Layer w0.381: J2.1@15.24,18.415 27.813,18.415 29.845,16.383 J3.15@29.845,15.24
L2A: J2.4 J3.14 | length 33.3
  Top Layer w0.381: J2.4@10.16,23.495 12.7,20.955 29.21,20.955 32.385,17.78 32.385,12.7 J3.14@34.925,10.16
L2B: J2.3 J3.13 | length 25.3
  Top Layer w0.381: J2.3@15.24,23.495 30.48,23.495 34.925,19.05 J3.13@34.925,15.24
L3A: J2.6 J3.12 | length 41.9
  Top Layer w0.381: J2.6@10.16,28.575 12.7,26.035 31.75,26.035 37.465,20.32 37.465,12.7 J3.12@40.005,10.16
L3B: J2.5 J3.11 | length 34
  Top Layer w0.381: J2.5@15.24,28.575 33.02,28.575 40.005,21.59 J3.11@40.005,15.24
L4A: J2.8 J3.10 | length 50.6
  Top Layer w0.381: J2.8@10.16,33.655 12.7,31.115 34.29,31.115 42.545,22.86 42.545,12.7 J3.10@45.085,10.16
L4B: J2.7 J3.9 | length 42.7
  Top Layer w0.381: J2.7@15.24,33.655 35.56,33.655 45.085,24.13 J3.9@45.085,15.24